# Altium PCB F407核心板整体封装.PcbDoc
Units mil, origin at the board's own origin, x right, y up, seen from the top; angles counter-clockwise.
Board outline 3322.66 x 1831.78 mil, 4 copper layers (Top, GND2, POWER3, Bottom), stack 35.4 mil thick; 6 components, 0 nets, 116 pads, 0 vias.
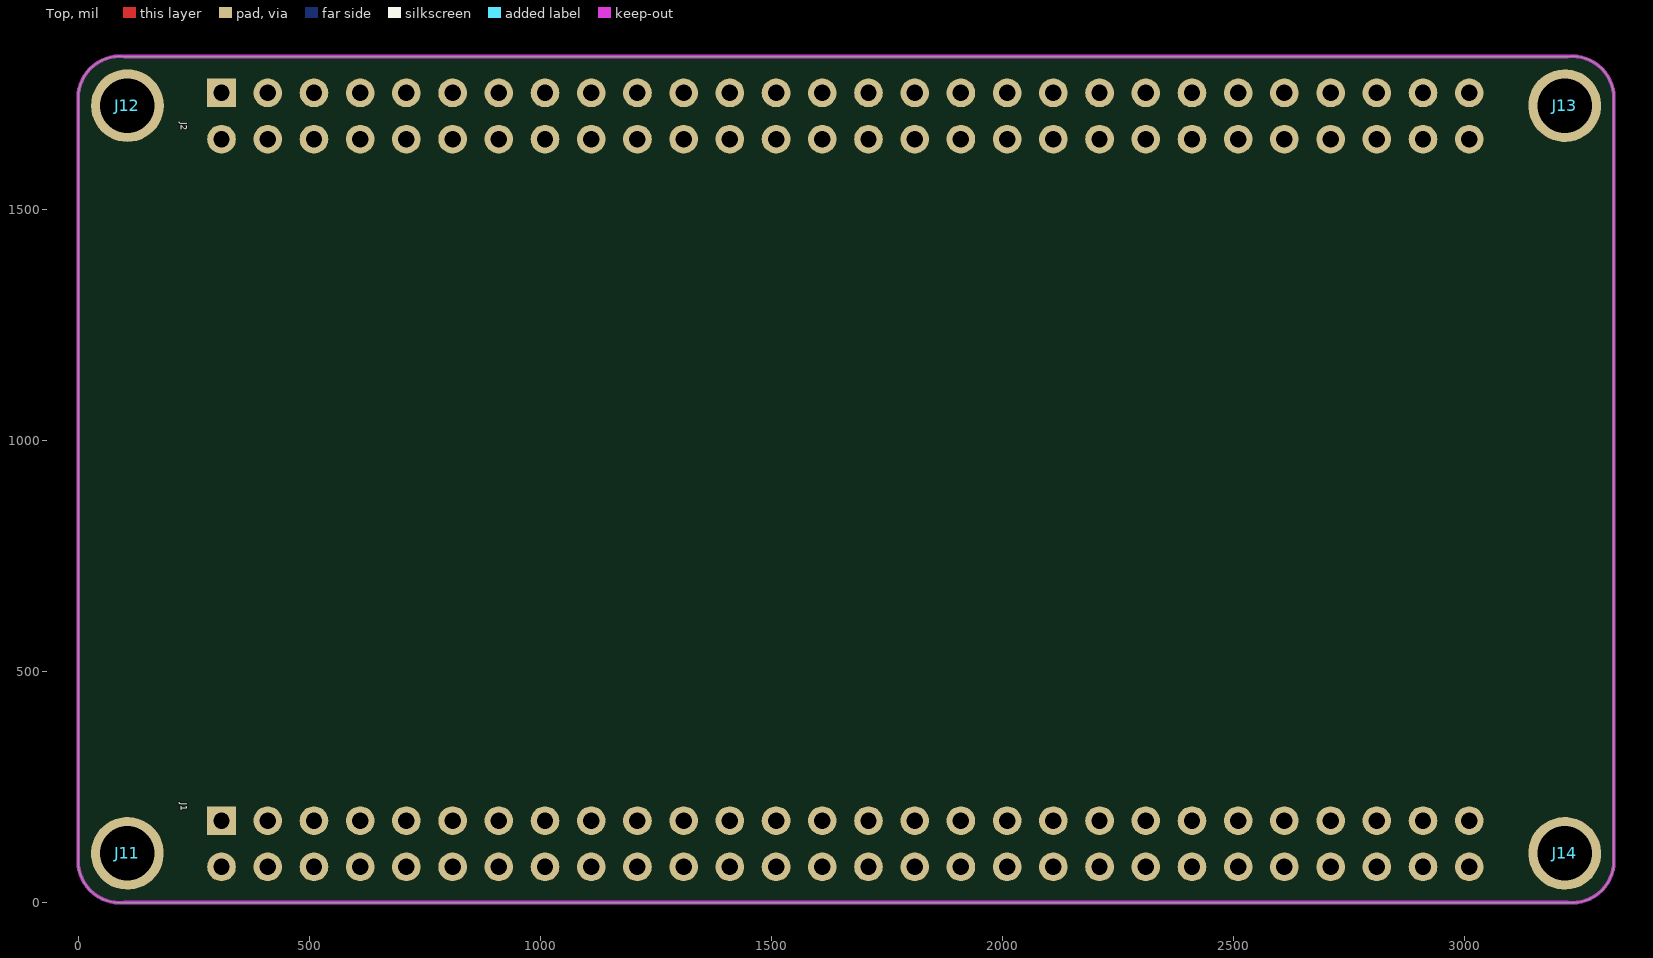
[diagram p0: Top view]
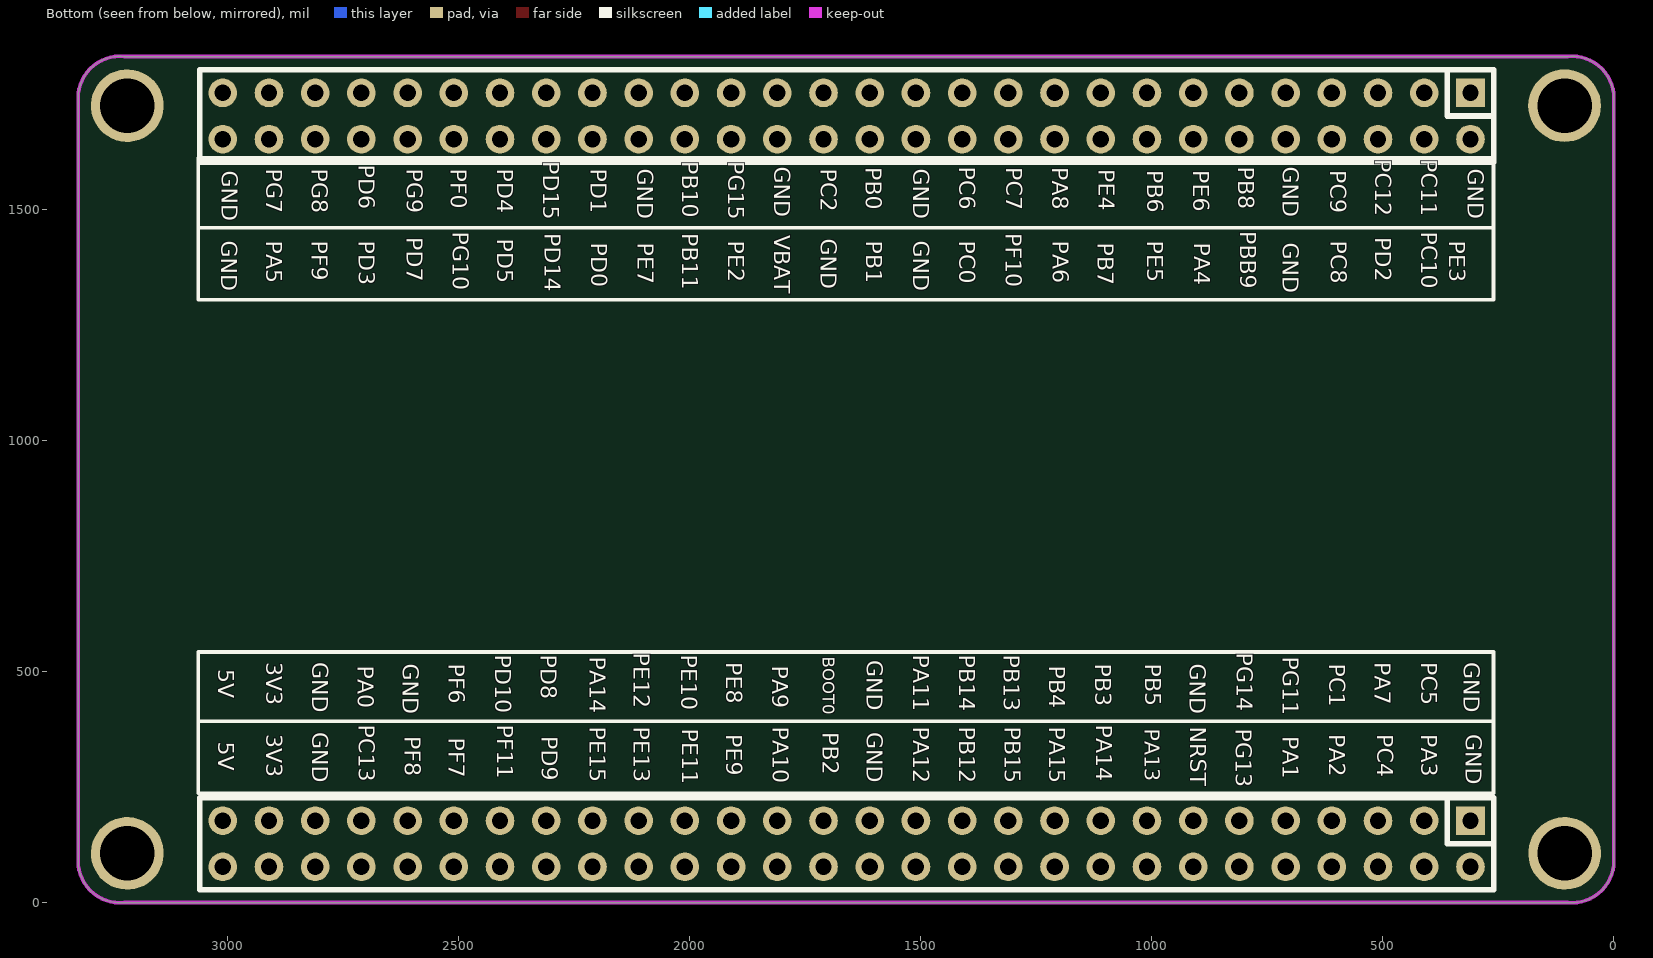
[diagram p1: Bottom view, seen from below]

## Layer stack, top to bottom
Solder Mask Top: solder mask 0.4, Solder Resist, Dk 3.5
Top: signal copper 1.35
Dielectric 1: dielectric 10, FR-4, Dk 4.3
GND2: signal copper 1.35
Dielectric2: dielectric 10, FR-4, Dk 4.3
POWER3: signal copper 1.35
Dielectric3: dielectric 10, FR-4, Dk 4.3
Bottom: signal copper 1.35
Solder Mask Bottom: solder mask 0.4, Solder Resist, Dk 3.5

## Board outline
0,1750.39 -0.01,1750.35 cw(c90.16,1740.55) 100,1830.71 3222.65,1830.71 3222.7,1830.71 cw(c3232.49,1740.55) 3322.65,1750.39 3322.65,80.31 3322.66,80.36 cw(c3232.49,90.16) 3222.65,0 100,0 99.95,-0.01 cw(c90.16,90.16) 0,80.31

## Design rules (kind name [scope] priority, off if disabled: settings)
Clearance "Clearance - Default - DEFAULT- SMD" [IsVia vs IsSMTPin] p1: gap=6 ignorepadtopadclearanceinfootprint=FALSE
Clearance "Clearance - Default - DEFAULT - Via" [IsVia vs IsVia] p2: gap=6 ignorepadtopadclearanceinfootprint=FALSE
Clearance "Clearance - Default - DEFAULT - Net" [All] p3: gap=8 ignorepadtopadclearanceinfootprint=FALSE except(0: Arc-Hole Track-Hole SMDPad-Hole THPad-Hole Via-Hole Fill-Hole Poly-Hole Region-Hole Text-Hole; 7: SMDPad-SMDPad; 10: Text-Text)
ComponentClearance "ComponentClearance - Default - DEFAULT" [All] p1: gap=6 collisioncheckmode=3 verticalgap=10 showdistances=FALSE
HoleToHoleClearance "HoleToHoleClearance - Default - DEFAULT" [All] p1: gap=6 allowstackedmicrovias=TRUE
Length "Default Length" [All] p1: maxlimit=50000 minlimit=0
MaxMinImpedance "Default Impedance" [All] p1: minimum=50.00 maximum=150.0
ParallelSegment "Default Parallel Segment Same Layer" [All] p1: limit=1000 gap=200
ParallelSegment "Default Parallel Segment Adjasent" [All] p2: limit=1000 gap=200
PlaneConnect "Default PlaneConnect" [All] p1: planeconnectstyle=Relief reliefexpansion=20 reliefentries=4 reliefconductorwidth=15 reliefairgap=10
PolygonConnect "PolygonConnect - Default SMT" [IsSMTPin] p1: connectstyle=Relief reliefconductorwidth=10 reliefentries=4 polygonreliefangle="45 Angle" airgapwidth=10
PolygonConnect "PolygonConnect - Default Pad" [All] p2: connectstyle=Relief reliefconductorwidth=15 reliefentries=4 polygonreliefangle="45 Angle" airgapwidth=10
RoutingLayers "RoutingLayers - Default - DEFAULT" [All] p1: top layer_v5=TRUE mid layer 1_v5=TRUE mid layer 2_v5=TRUE bottom layer_v5=TRUE
RoutingPriority "RoutingPriority - Default - DEFAULT" [All] p1: routingpriority=3
RoutingTopology "Default Routing Topology" [All] p1: topology=Shortest
RoutingVias "RoutingVias - Default - DEFAULT" [All] p1: holewidth=12 width=18 viastyle="Through Hole" minholewidth=12 minwidth=18 maxholewidth=12 maxwidth=18
SMDToCorner "SMDToCorner - Default - DEFAULT" [All] p1: distance=60000
SolderMaskExpansion "SolderMaskExpansion from CAM settings" [All] p1: expansion=5
Width "Default Width" [All] p1: maxlimit=100 minlimit=6 preferedwidth=8
22 further rules are at their usual default settings.

## Components (designator, comment, footprint, x,y, rotation, side; value= is the part's Value field where it differs from the comment)
J1 "2X28X2.54MM" 2X28X2.54MM 310,177.17 r270 top
J2 "2X28X2.54MM" 2X28X2.54MM 310,1751.97 r270 top
J11 "3.0MM" 3.0MM 106.3,106.3 r357 top
J12 "3.0MM" 3.0MM 106.3,1724.41 r0 top
J13 "3.0MM" 3.0MM 3216.54,1724.41 r3 top
J14 "3.0MM" 3.0MM 3216.54,106.3 r3 top

## Footprints (in the part's own frame and the unit in brackets; to place one, negate y for a bottom-side part, rotate by r counter-clockwise, add the part's x,y. Pads: shape width x height; smd on the part's side, far side on the other; paste and mask are expansions set on the pad)
2X28X2.54MM [mil]
  rect 62x62 hole 35.43: 1(0,0)
  round 62 hole 35.43: 2(100,0) 3(0,100) 4(100,100) 5(0,200) 6(100,200) 7(0,300) 8(100,300) 9(0,400) 10(100,400) 11(0,500) 12(100,500) 13(0,600) 14(100,600) 15(0,700) 16(100,700) 17(0,800) 18(100,800) 19(0,900) 20(100,900) 21(0,1000) 22(100,1000) 23(0,1100) 24(100,1100) 25(0,1200) 26(100,1200) 27(0,1300) 28(100,1300) 29(0,1400) 30(100,1400) 31(0,1500) 32(100,1500) 33(0,1600) 34(100,1600) 35(0,1700) 36(100,1700) 37(0,1800) 38(100,1800) 39(0,1900) 40(100,1900) 41(0,2000) 42(100,2000) 43(0,2100) 44(100,2100) 45(0,2200) 46(100,2200) 47(0,2300) 48(100,2300) 49(0,2400) 50(100,2400) 51(0,2500) 52(100,2500) 53(0,2600) 54(100,2600) 55(0,2700) 56(100,2700)
3.0MM [mm]
  round 4 hole 3: 1(0,0)

## Nets (pads, with @x,y where several pads share a name; then routed paths per layer and width w, separated by ;. In a path a pad name is that pad's centre, name@x,y a point inside that pad or via, vN(x,y) a via of type N, cw(c..) or ccw(c..) an arc to the next point about the centre after c; other vN are vias at no path point)
pads on no net: J1.1 J1.2 J1.3 J1.4 J1.5 J1.6 J1.7 J1.8 J1.9 J1.10 J1.11 J1.12 J1.13 J1.14 J1.15 J1.16 J1.17 J1.18 J1.19 J1.20 J1.21 J1.22 J1.23 J1.24 J1.25 J1.26 J1.27 J1.28 J1.29 J1.30 J1.31 J1.32 J1.33 J1.34 J1.35 J1.36 J1.37 J1.38 J1.39 J1.40 J1.41 J1.42 J1.43 J1.44 J1.45 J1.46 J1.47 J1.48 J1.49 J1.50 J1.51 J1.52 J1.53 J1.54 J1.55 J1.56 J2.1 J2.2 J2.3 J2.4 J2.5 J2.6 J2.7 J2.8 J2.9 J2.10 J2.11 J2.12 J2.13 J2.14 J2.15 J2.16 J2.17 J2.18 J2.19 J2.20 J2.21 J2.22 J2.23 J2.24 J2.25 J2.26 J2.27 J2.28 J2.29 J2.30 J2.31 J2.32 J2.33 J2.34 J2.35 J2.36 J2.37 J2.38 J2.39 J2.40 J2.41 J2.42 J2.43 J2.44 J2.45 J2.46 J2.47 J2.48 J2.49 J2.50 J2.51 J2.52 J2.53 J2.54 J2.55 J2.56 J11.1 J12.1 J13.1 J14.1

## Keep-outs
Keep-Out Layer:
  lines w8: 0,80.31 0,1750.39 ; -0.01,80.36 ccw(c90.16,90.16) 99.95,-0.01 ; -0.01,1750.35 cw(c90.16,1740.55) 99.95,1830.71 ; 100,0 3222.65,0 ; 100,1830.71 3222.65,1830.71 ; 3222.7,-0.01 ccw(c3232.49,90.16) 3322.66,80.36 ; 3222.7,1830.71 cw(c3232.49,1740.55) 3322.66,1750.35 ; 3322.65,80.31 3322.65,1750.39

## Silkscreen, mask and mechanical layers (free items; w line width, h text height)
Silkscreen Bottom:
  lines w8: 260,392.32 3058.35,392.32 ; 260,1460.32 3060,1460.32 ; 260,236.32 260,542.32 3062.7,542.32 3062.7,236.32 260,236.32 ; 260,1304.32 260,1611.15 3062.71,1611.15 3062.71,1304.32 260,1304.32
  text "PC11" at 428,1608 h60 r90
  text "PC12" at 528,1608 h60 r90
  text "PG15" at 1928,1604 h60 r90
  text "PB10" at 2028,1604 h60 r90
  text "PD15" at 2328,1604 h60 r90
  text "PD6" at 2728,1596 h60 r90
  text "GND" at 728,1592 h60 r90
  text "PB8" at 824,1592 h60 r90
  text "PC6" at 1428,1592 h60 r90
  text "GND" at 1828,1592 h60 r90
  text "PA8" at 1226.71,1591.15 h60 r90
  text "PC7" at 1326.71,1591.15 h60 r90
  text "PB0" at 1630.71,1591.15 h60 r90
  text "GND" at 2125.35,1588.32 h60 r90
  text "PD1" at 2225.35,1588.32 h60 r90
  text "PG8" at 2829.35,1588.32 h60 r90
  text "GND" at 328,1588 h60 r90
  text "GND" at 1528,1588 h60 r90
  text "PC2" at 1728,1588 h60 r90
  text "PD4" at 2428,1588 h60 r90
  text "PF0" at 2528,1588 h60 r90
  text "PG9" at 2624,1588 h60 r90
  text "PG7" at 2928,1588 h60 r90
  text "PE4" at 1126.71,1587.15 h60 r90
  text "PC9" at 625.35,1584.32 h60 r90
  text "PE6" at 921.35,1584.32 h60 r90
  text "PB6" at 1021.35,1584.32 h60 r90
  text "GND" at 3024,1584 h60 r90
  text "PBB9" at 820,1452.31 h60 r90
  text "PC10" at 428,1452 h60 r90
  text "PG10" at 2524,1452 h60 r90
  text "PD14" at 2325.35,1448.32 h60 r90
  text "PF10" at 1328,1448 h60 r90
  text "PB11" at 2028,1448 h60 r90
  text "VBAT" at 1828,1444 h60 r90
  text "PD2" at 528,1440 h60 r90
  text "PD7" at 2624,1440 h60 r90
  text "GND" at 1728,1436 h60 r90
  text "PD5" at 2428,1436 h60 r90
  text "PE5" at 1021.35,1432.32 h60 r90
  text "PA6" at 1225.35,1432.32 h60 r90
  text "PB1" at 1629.35,1432.32 h60 r90
  text "PF9" at 2829.35,1432.32 h60 r90
  text "GND" at 3025.35,1432.32 h60 r90
  text "PE3" at 368,1432 h60 r90
  text "PC8" at 624,1432 h60 r90
  text "PC0" at 1428,1432 h60 r90
  text "GND" at 1528,1432 h60 r90
  text "PE2" at 1928,1432 h60 r90
  text "PD3" at 2728,1432 h60 r90
  text "PA5" at 2928,1432 h60 r90
  text "GND" at 728,1428 h60 r90
  text "PA4" at 920,1428 h60 r90
  text "PB7" at 1128,1428 h60 r90
  text "PE7" at 2124,1428 h60 r90
  text "PD0" at 2224,1428 h60 r90
  text "PG14" at 828,540.31 h60 r90
  text "PE12" at 2132,540 h60 r90
  text "PB13" at 1332,536.31 h60 r90
  text "PE10" at 2029.35,536.32 h60 r90
  text "PD8" at 2333.35,536.32 h60 r90
  text "PD10" at 2432,536.31 h60 r90
  text "PB14" at 1428,536 h60 r90
  text "PA11" at 1528,536 h60 r90
  text "PG11" at 728,532.31 h60 r90
  text "PA14" at 2228,532.31 h60 r90
  text "BOOT0" at 1720,532 h45 r90
  text "GND" at 1628,524 h60 r90
  text "PA7" at 529.35,520.32 h60 r90
  text "GND" at 2828,520.31 h60 r90
  text "3V3" at 2928,520.31 h60 r90
  text "GND" at 336,520 h60 r90
  text "PC5" at 428,520 h60 r90
  text "PE8" at 1932,520 h60 r90
  text "PC1" at 628,516.31 h60 r90
  text "GND" at 929.35,516.32 h60 r90
  text "PB5" at 1025.35,516.32 h60 r90
  text "PB3" at 1133.35,516.32 h60 r90
  text "PF6" at 2533.35,516.32 h60 r90
  text "GND" at 2632,516.31 h60 r90
  text "PB4" at 1233.35,512.32 h60 r90
  text "PA9" at 1833.35,512.32 h60 r90
  text "PA0" at 2729.35,512.32 h60 r90
  text "5V" at 3032,504.31 h60 r90
  text "PA14" at 1132,384.31 h60 r90
  text "PF11" at 2428,384.31 h60 r90
  text "PC13" at 2728,384.31 h60 r90
  text "NRST" at 928,380.31 h60 r90
  text "PA15" at 1233.35,380.32 h60 r90
  text "PB15" at 1329.35,380.32 h60 r90
  text "PE15" at 2228,380.31 h60 r90
  text "PB12" at 1428,380 h60 r90
  text "PA12" at 1528,380 h60 r90
  text "PA10" at 1832,380 h60 r90
  text "PE13" at 2132,380 h60 r90
  text "PG13" at 829.35,376.32 h60 r90
  text "PA13" at 1026,376.31 h55 r90
  text "PE11" at 2028,376 h60 r90
  text "GND" at 2828,368.31 h60 r90
  text "GND" at 1628,368 h60 r90
  text "PB2" at 1724,368 h60 r90
  text "GND" at 332,364.31 h60 r90
  text "3V3" at 2928,364.31 h60 r90
  text "PA3" at 428,364 h60 r90
  text "PC4" at 524,364 h60 r90
  text "PA2" at 628,364 h60 r90
  text "PE9" at 1932,364 h60 r90
  text "PF8" at 2628,360.31 h60 r90
  text "PA1" at 728,360 h60 r90
  text "PD9" at 2332,360 h60 r90
  text "PF7" at 2533.35,356.32 h60 r90
  text "5V" at 3032,348.31 h60 r90
Assembly Drawing Top:
  drawing of 896 lines, arcs and shapes, not listed
Layer_8:
  lines w8: 0,0 0,1830.71 3322.65,1830.71 3322.65,0 0,0
Layer_10:
  lines w8: 0,-19.69 0,1850.39 3322.65,1850.39 3322.65,-19.69 0,-19.69
Layer_20:
  lines w1: 0,0 0.03,0 ; 0,106.3 0.03,106.3 ; 0,177.17 0.03,177.17 ; 106.3,0 106.33,0 ; 106.3,1724.41 106.33,1724.41 ; 310,0 310.03,0 ; 310,1751.97 310.03,1751.97 ; 3322.65,1830.71 3322.68,1830.71 ; 106.3,106.3 106.33,106.3 ; 106.3,106.3 106.33,106.3 ; 106.3,106.3 106.33,106.3 ; 106.3,106.3 106.33,106.3 ; 310,177.17 310.03,177.17 ; 310,177.17 310.03,177.17 ; 310,177.17 310.03,177.17 ; 3216.54,106.3 3216.56,106.3 ; 3216.54,106.3 3216.56,106.3 ; 3216.54,106.3 3216.56,106.3 ; 0,1830.71 0.03,1830.71 0,1830.71 ; 3155.84,0 3155.87,0 ; 3216.54,1724.41 3216.56,1724.41
  lines w10: -650,0 -50,0 ; -650,1830.71 -50,1830.71 ; -500,106.3 56.3,106.3 -400,106.3 ; -500,1724.41 56.3,1724.41 ; -400,0 56.3,0 ; -350,-150 -350,0 ; -350,256.3 -350,106.3 ; -300,177.17 260,177.17 -200,177.17 ; -300,1751.97 260,1751.97 ; -200,0 260,0 ; -150,-250 0,-250 ; -150,-150 -150,0 ; -150,327.17 -150,177.17 ; 0,-450 0,127.17 ; 0,-300 0,56.3 ; 0,1880.71 0,2050 ; 106.3,-300 106.3,56.3 106.3,-200 ; 256.3,-250 106.3,-250 ; 310,-450 310,127.17 ; 1476.87,-150 106.3,-150 ; 1845.96,-150 3216.54,-150 ; 3205.84,0 3700,0 ; 3216.54,-200 3216.54,56.3 ; 3266.54,1724.41 3600,1724.41 ; 3322.65,1880.71 3322.65,2050 ; 3550,847.85 3550,106.3 ; 3550,982.85 3550,1724.41 ; 3600,106.3 3266.54,106.3 3700,106.3 ; 3650,-150 3650,0 ; 3650,256.3 3650,106.3 ; -600,0 -575,100 -625,100 -600,0 ; -600,0 -600,1830.71 ; -600,1830.71 -625,1730.71 -575,1730.71 -600,1830.71 ; -450,106.3 -425,206.3 -475,206.3 -450,106.3 ; -450,106.3 -450,1724.41 ; -450,1724.41 -475,1624.41 -425,1624.41 -450,1724.41 ; -350,0 -375,-100 -325,-100 -350,0 ; -350,106.3 -325,206.3 -375,206.3 -350,106.3 ; -250,177.17 -225,277.17 -275,277.17 -250,177.17 ; -250,177.17 -250,1751.97 ; -250,1751.97 -275,1651.97 -225,1651.97 -250,1751.97 ; -150,0 -175,-100 -125,-100 -150,0 ; -150,177.17 -125,277.17 -175,277.17 -150,177.17 ; 0,-400 100,-425 100,-375 0,-400 ; 0,-400 310,-400 ; 0,-250 -100,-225 -100,-275 0,-250 ; 0,2000 100,1975 100,2025 0,2000 ; 0,2000 3322.65,2000 ; 106.3,-250 206.3,-275 206.3,-225 106.3,-250 ; 106.3,-150 206.3,-175 206.3,-125 106.3,-150 ; 310,-400 210,-375 210,-425 310,-400 ; 3216.54,-150 3116.54,-125 3116.54,-175 3216.54,-150 ; 3322.65,2000 3222.65,2025 3222.65,1975 3322.65,2000 ; 3550,106.3 3575,206.3 3525,206.3 3550,106.3 ; 3550,1724.41 3525,1624.41 3575,1624.41 3550,1724.41 ; 3650,0 3625,-100 3675,-100 3650,0 ; 3650,106.3 3675,206.3 3625,206.3 3650,106.3
  text "84.4mm" at 1500,2050 h50
  text "41.1mm" at 3413.64,877.85 h50
  text "46.5mm" at -650,850 h50 r90
  text "41.1mm" at -500,850 h50 r90
  text "40.0mm" at -300,850 h50 r90
  text "4.5mm" at -100,400 h50 r90
  text "2.7mm" at -350,300 h50 r90
  text "2.7mm" at 3750,150 h50
  text "79.0mm" at 1506.87,-187.5 h50
  text "2.7mm" at -450,-250 h50
  text "7.9mm" at -450,-450 h50